# Altium PCB PCB1.PcbDoc
Units mm, origin at the board's own origin, x right, y up, seen from the top; angles counter-clockwise.
Board outline 152.4 x 101.6 mm, 2 copper layers (Top Layer, Bottom Layer); 9 components, 14 nets, 60 pads, 0 vias.
Unrouted connection lines stored in the file: 22.
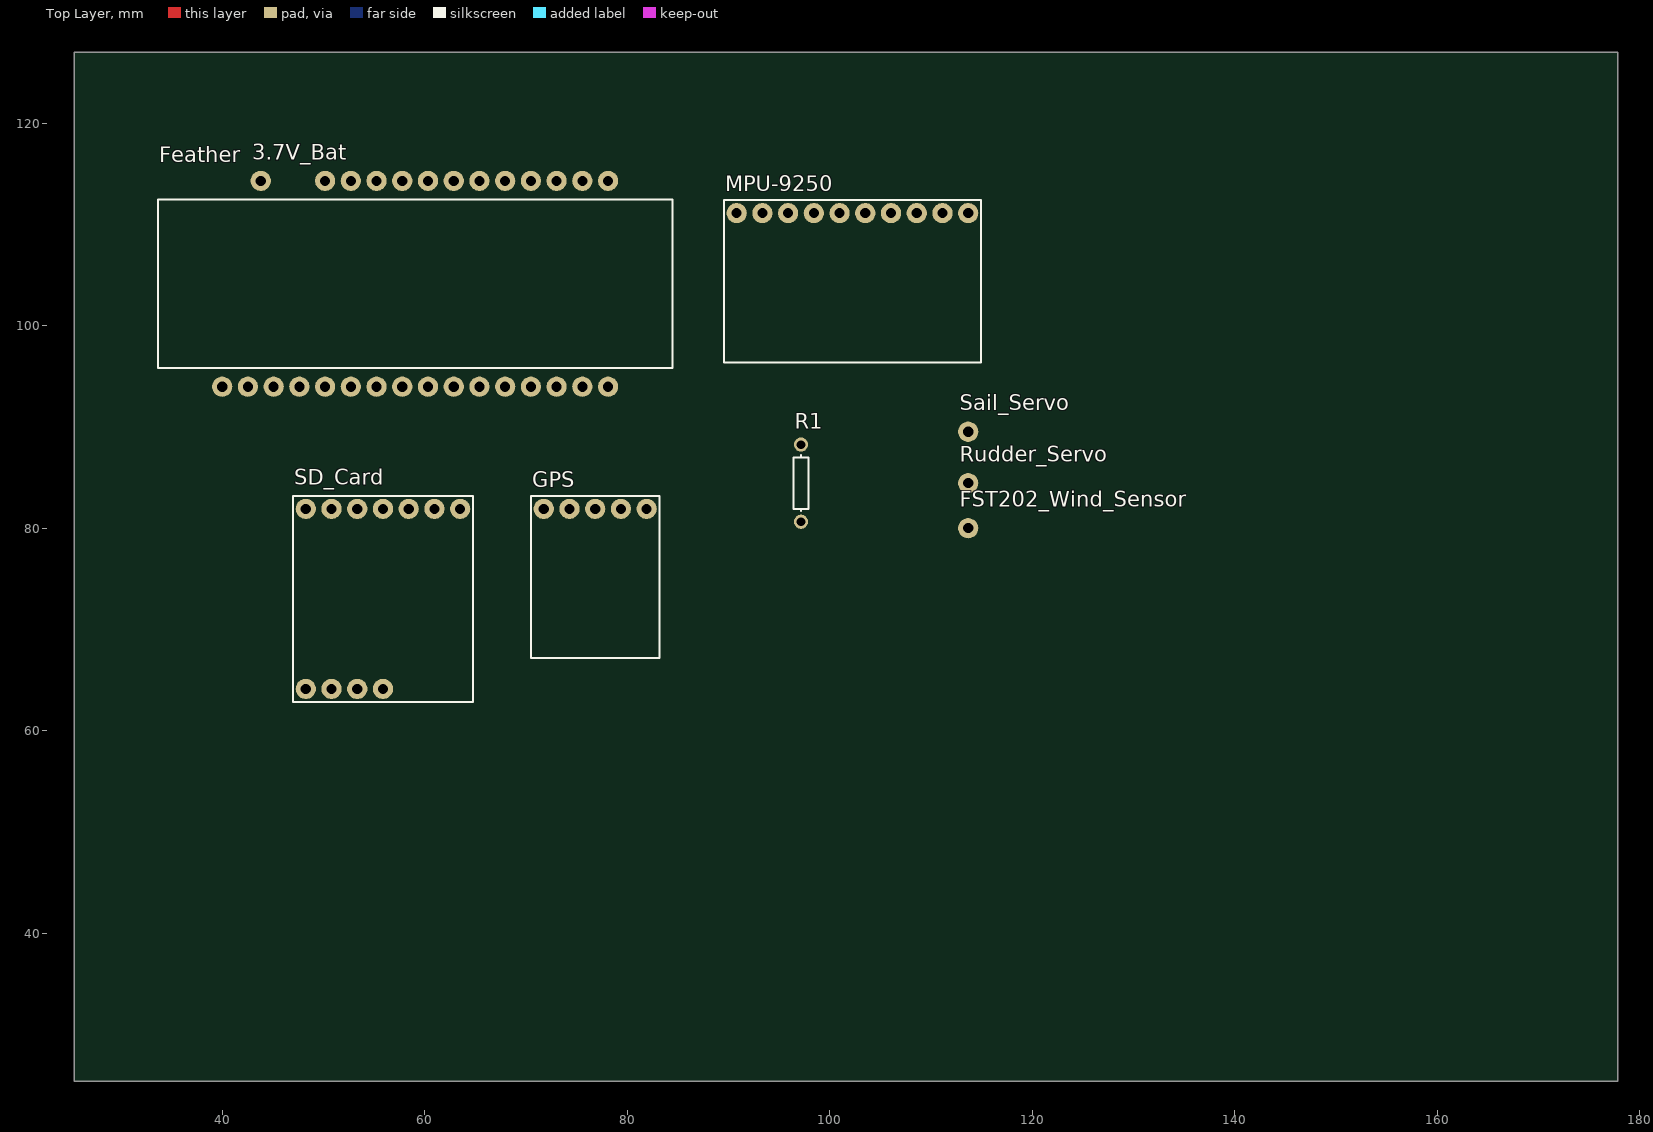
[diagram p0: Top Layer view]
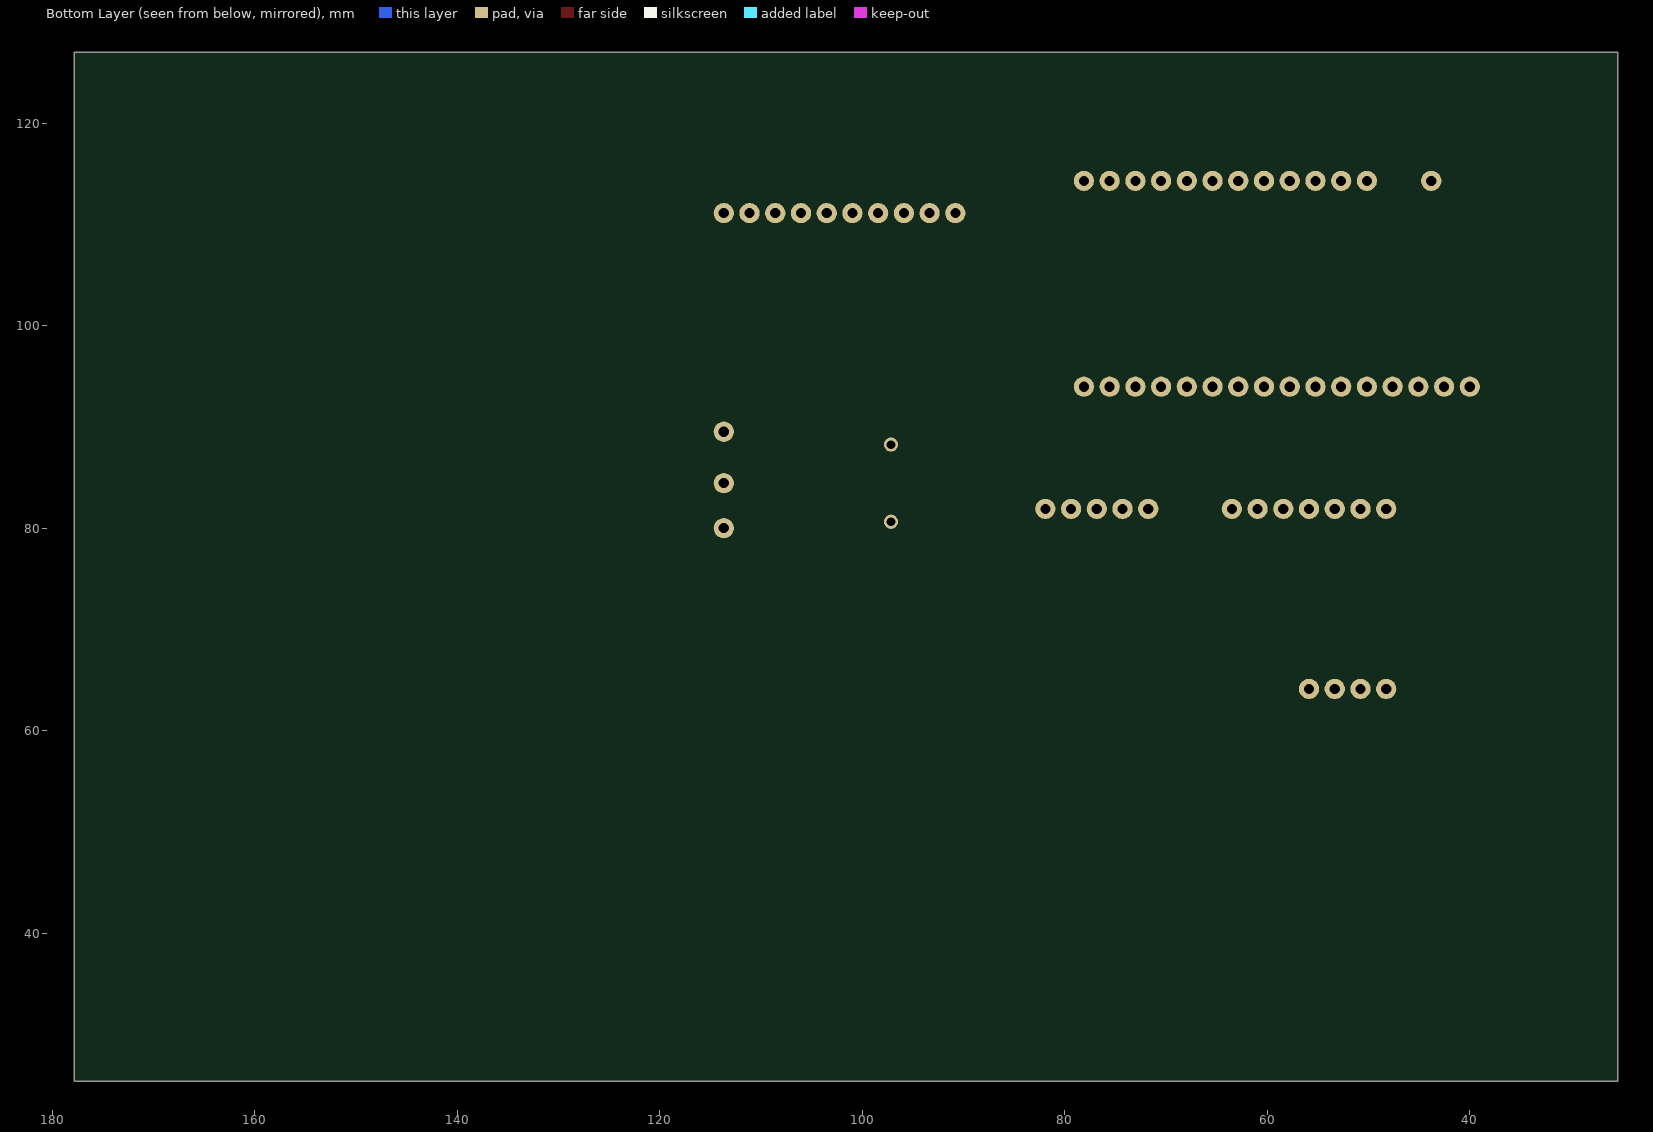
[diagram p1: Bottom Layer view, seen from below]

## Layer stack, top to bottom
Top Solder: solder mask 0.0102, Solder Resist, Dk 3.5
Top Layer: signal copper 0.0356
Dielectric 1: dielectric 0.32, FR-4, Dk 4.8
Bottom Layer: signal copper 0.0356
Bottom Solder: solder mask 0.0102, Solder Resist, Dk 3.5

## Board outline
25.4,25.4 177.8,25.4 177.8,127 25.4,127

## Design rules (kind name [scope] priority, off if disabled: settings)
Clearance [All] p1: gap=0.254 ignorepadtopadclearanceinfootprint=FALSE except(0: Arc-Hole Track-Hole SMDPad-Hole THPad-Hole Via-Hole Fill-Hole Poly-Hole Region-Hole Text-Hole)
PolygonConnect [All] p1: connectstyle=Relief reliefconductorwidth=0.254 reliefentries=4 polygonreliefangle="90 Angle" airgapwidth=0.254
RoomDefinition Sheet1 [InComponentClass('Sheet1')] p1: confinementstyle=ConfineIn formatcopy=TRUE lockcomponents=FALSE outline 180.34,27.94 337.185,27.94 337.185,82.55 180.34,82.55
RoutingVias [All] p1: holewidth=0.711 width=1.27 viastyle="Through Hole" minholewidth=0.711 minwidth=1.27 maxholewidth=0.711 maxwidth=1.27
SolderMaskExpansion [All] p1: expansion=0.102 istentingtop=FALSE
Width [All] p1: maxlimit=0.254 minlimit=0.254 preferedwidth=0.254
30 further rules are at their usual default settings.

## Components (designator, comment, footprint, x,y, rotation, side; value= is the part's Value field where it differs from the comment)
3.7V_Bat "External_Connection" CONNECTOR 43.815,114.3 r90 top
Feather "Adafuit_feather_STM32F405" ADAFUIT_FEATHER_STM32F405 40.005,93.98 r90 top
FST202_Wind_Sensor "External_Connection_input" CONNECTOR 113.665,80.01 r90 top
GPS "GPS_ATGM336H" GPS 81.915,81.915 r270 top
MPU-9250 "MPU-9250/6500" MPU-9250/6500 113.665,111.125 r270 top
R1 "Res1" AXIAL-0.3 97.155,84.455 r90 top value=1K
Rudder_Servo "External_Connection_output" CONNECTOR 113.665,84.455 r90 top
Sail_Servo "External_Connection_output" CONNECTOR 113.665,89.535 r90 top
SD_Card "SD_Card_Socket" SD_CARD_SOCKET 48.26,64.135 r90 top

## Footprints (in the part's own frame and the unit in brackets; to place one, negate y for a bottom-side part, rotate by r counter-clockwise, add the part's x,y. Pads: shape width x height; smd on the part's side, far side on the other; paste and mask are expansions set on the pad)
ADAFUIT_FEATHER_STM32F405 [mm]
  round 2 hole 1: 3.3V(0,-2.54) 3.3V(1)(0,-5.08) 5(20.32,-33.02) 6(20.32,-30.48) 9(20.32,-27.94) 10(20.32,-25.4) 11(20.32,-22.86) 12(20.32,-20.32) 13(20.32,-17.78) A0(0,-10.16) A1(0,-12.7) A2(0,-15.24) A3(0,-17.78) A4(0,-20.32) A5(0,-22.86) B0(0,-38.1) BAT(20.32,-10.16) EN(20.32,-12.7) GND(0,-7.62) MI(0,-30.48) MO(0,-27.94) RST(0,0) RX(0,-33.02) SCK(0,-25.4) SCL(20.32,-35.56) SDA(20.32,-38.1) TX(0,-35.56) USB(20.32,-15.24)
  silkscreen extent 1.84,-44.45 18.48,6.35
AXIAL-0.3 [mm] "Axial Device, Thru-Hole; 2 Leads; 0.3 in Pin Spacing"
  round 1.4 hole 0.85: 1(-3.81,0) 2(3.81,0)
  silkscreen extent -2.77,-0.76 2.77,0.76
CONNECTOR [mm]
  round 2 hole 1: 1(0,0)
GPS [mm]
  round 2 hole 1: GND(0,-2.54) PPS(0,-10.16) RX(0,-7.62) TX(0,-5.08) VCC(0,0)
  silkscreen extent -1.27,-11.43 14.73,1.27
MPU-9250/6500 [mm]
  round 2 hole 1: AD0(0,-15.24) ECL(0,-12.7) EDA(0,-10.16) FSYNC(0,-22.86) GND(0,-2.54) INT(0,-17.78) NCS(0,-20.32) SCL(0,-5.08) SDA(0,-7.62) VCC(0,0)
  silkscreen extent -1.27,-24.13 14.73,1.27
SD_CARD_SOCKET [mm]
  round 2 hole 1: CD(17.78,-15.24) CS(17.78,-12.7) DAT1/IRQ(0,-7.62) DAT2(0,-5.08) DI(17.78,-5.08) DO(17.78,-7.62) GND(17.78,0) GND(1)(0,0) SCLK(17.78,-10.16) VDD(17.78,-2.54) VDD(1)(0,-2.54)
  silkscreen extent -1.27,-16.51 19.05,1.27

## Part data
R1: "Resistor", LatestRevisionDate=17-Jul-2002, LatestRevisionNote="Re-released for DXP Platform.", PackageDescription="Axial Device, Thru-Hole; 2 Leads; 0.3 in Pin Spacing", PackageReference=AXIAL-0.3, Published=8-Jun-2000, Publisher="Altium Limited"

## Nets (pads, with @x,y where several pads share a name; then routed paths per layer and width w, separated by ;. In a path a pad name is that pad's centre, name@x,y a point inside that pad or via, vN(x,y) a via of type N, cw(c..) or ccw(c..) an arc to the next point about the centre after c; other vN are vias at no path point)
GND: Feather.GND GPS.GND MPU-9250.FSYNC MPU-9250.GND R1.2 SD_Card.GND
Net3.7V_Bat_1: 3.7V_Bat.1 Feather.BAT
NetFeather_3.3V: Feather.3.3V GPS.VCC MPU-9250.AD0 MPU-9250.VCC SD_Card.VDD
NetFeather_6: Feather.6 SD_Card.CS
NetFeather_9: Feather.9 Sail_Servo.1
NetFeather_A2: Feather.A2 Rudder_Servo.1
NetFeather_A3: Feather.A3 FST202_Wind_Sensor.1 R1.1
NetFeather_MI: Feather.MI SD_Card.DO
NetFeather_MO: Feather.MO SD_Card.DI
NetFeather_RX: Feather.RX GPS.TX
NetFeather_SCK: Feather.SCK SD_Card.SCLK
NetFeather_SCL: Feather.SCL MPU-9250.SCL
NetFeather_SDA: Feather.SDA MPU-9250.SDA
NetFeather_TX: Feather.TX GPS.RX
pads on no net: Feather.3.3V(1) Feather.5 Feather.10 Feather.11 Feather.12 Feather.13 Feather.A0 Feather.A1 Feather.A4 Feather.A5 Feather.B0 Feather.EN Feather.RST Feather.USB GPS.PPS MPU-9250.ECL MPU-9250.EDA MPU-9250.INT MPU-9250.NCS SD_Card.CD SD_Card.DAT1/IRQ SD_Card.DAT2 SD_Card.GND(1) SD_Card.VDD(1)

## Silkscreen, mask and mechanical layers (free items; w line width, h text height)
Mechanical 1:
  lines w0.254: 31.75,55.245 31.75,120.65 116.84,120.65 116.84,55.245 31.75,55.245